# Altium PCB MainBoard.PcbDoc (part 5 of 5)
Units mm, origin at the board's own origin, x right, y up, seen from the top; angles counter-clockwise.
Board outline 82.15 x 81.5 mm, 4 copper layers (Top Layer, GND Top, GND Bot, Bottom Layer), stack 1.57 mm thick; 116 components, 97 nets, 468 pads, 3117 vias.
Unrouted connection lines stored in the file: 5.
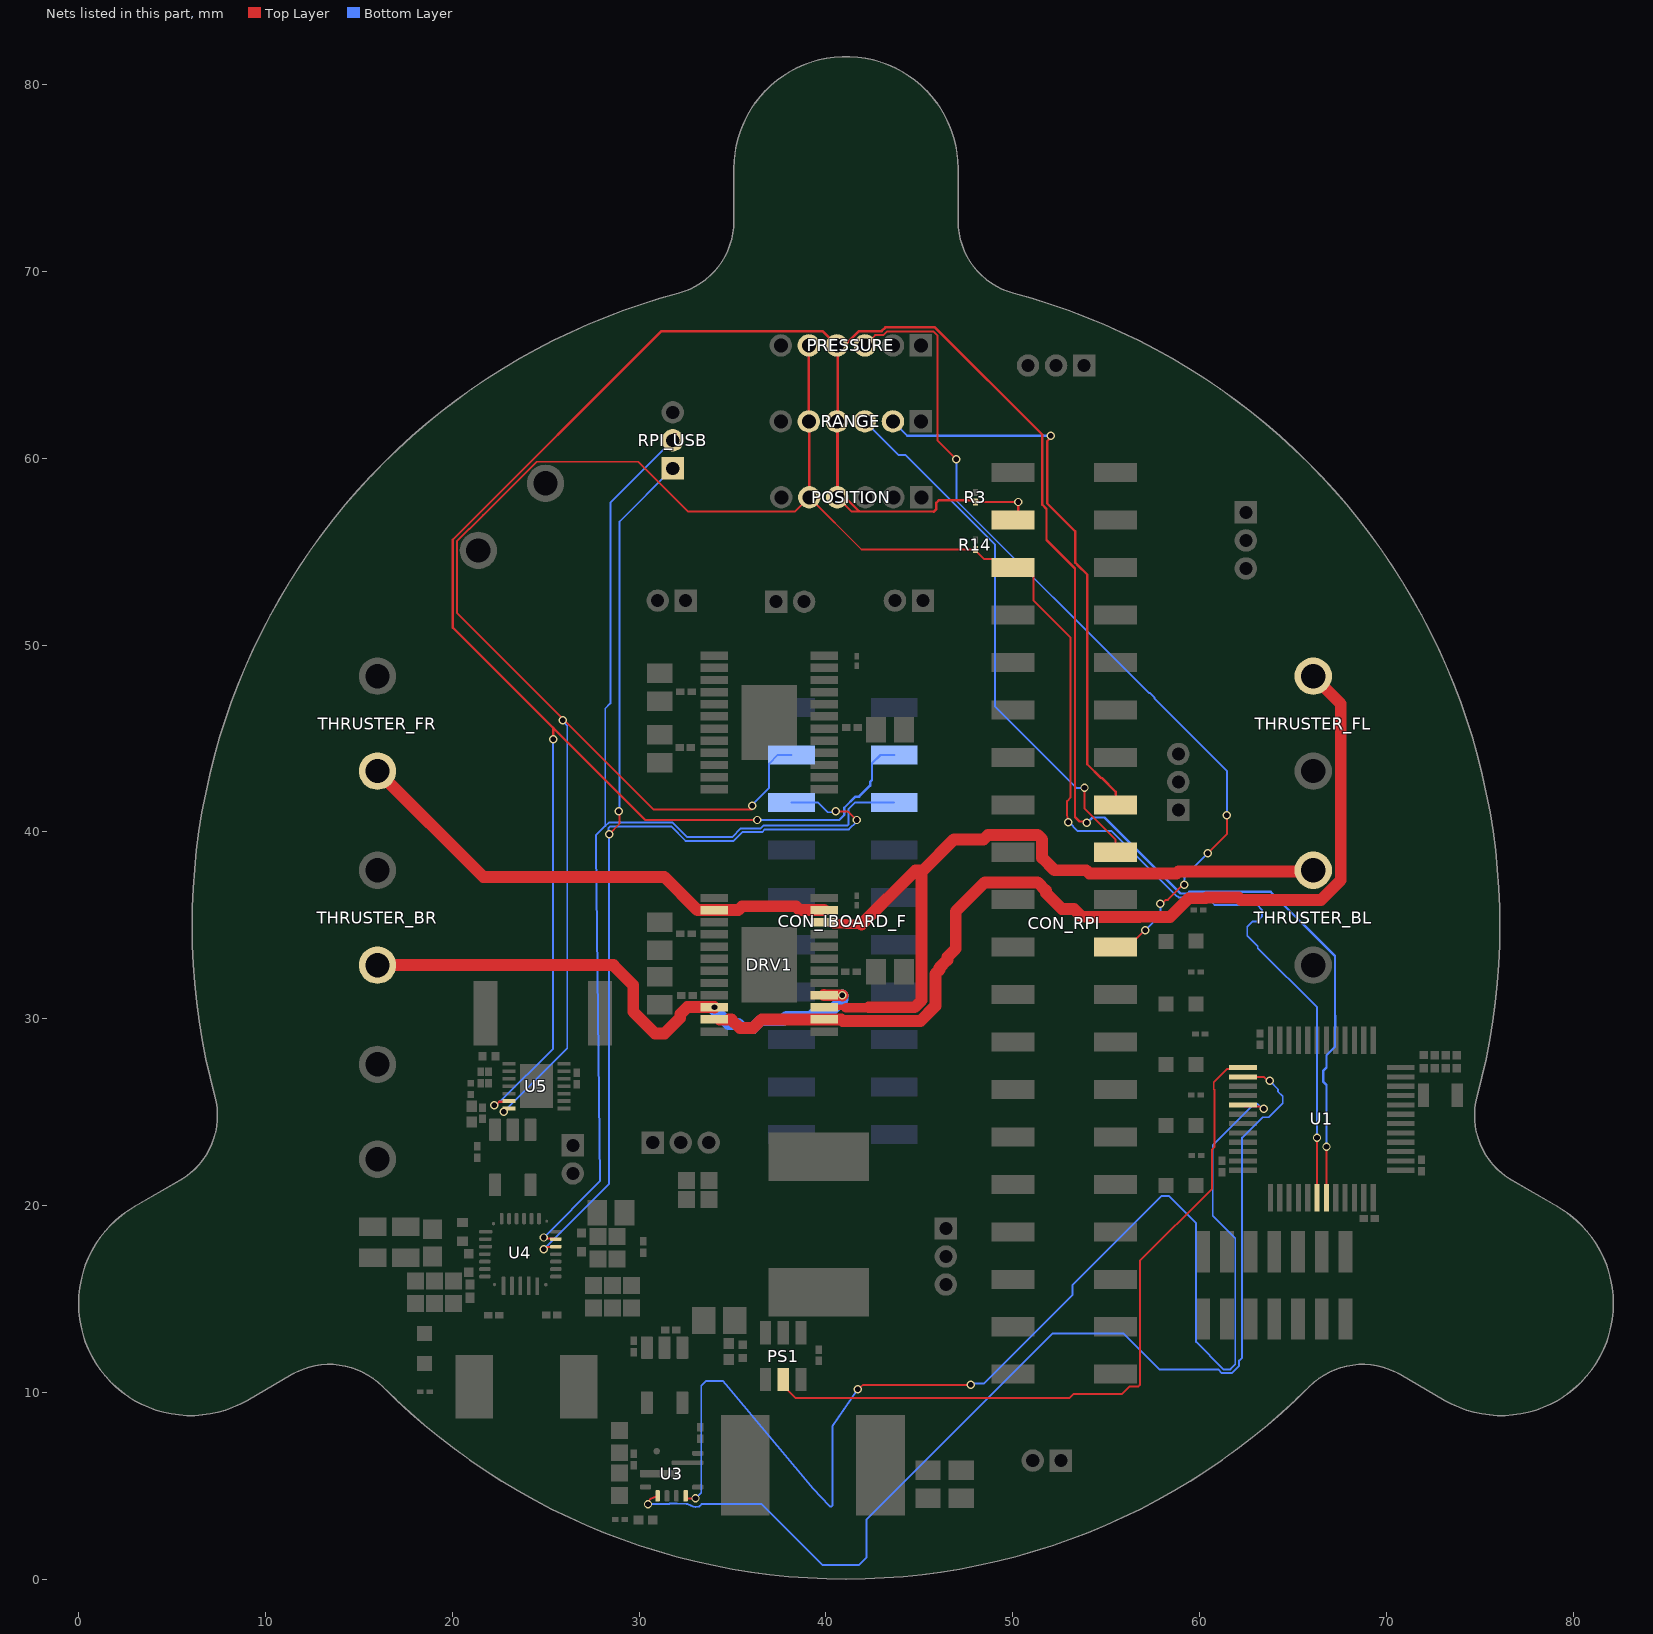
[diagram p6: the nets of this part, all layers, seen from the top]

## Via types
v1: diameter 0.45, hole 0.3, Top Layer to Bottom Layer, tented both sides, 3113 vias
v2: diameter 0.45, hole 0.3, Top Layer to Bottom Layer, 4 vias

## Nets (pads, with @x,y where several pads share a name; then routed paths per layer and width w, separated by ;. In a path a pad name is that pad's centre, name@x,y a point inside that pad or via, vN(x,y) a via of type N, cw(c..) or ccw(c..) an arc to the next point about the centre after c; other vN are vias at no path point) (continued)
PRESSURE_EOC: CON_RPI.22 PRESSURE.3 | length 46.5
  Top Layer w0.102: PRESSURE.3@42.092,66.04 42.641,66.589 43.077,66.589 43.28,66.792 45.755,66.792 45.974,66.573 45.974,60.96 v1(46.99,59.944) ; CON_RPI.22@55.512,33.833 56.152,33.833 57.06,34.741 v1(57.093,34.741) ; v1(57.912,36.161) 58.006,36.161 58.209,36.363 58.315,36.363 59.118,37.167 v1(59.182,37.167) ; v1(60.452,38.862) 61.468,39.878 v1(61.468,40.894)
  Bottom Layer w0.102: v1(46.99,59.944) 46.99,57.741 57.292,47.438 57.334,47.438 57.601,47.172 57.601,47.13 61.468,43.263 v1(61.468,40.894) ; v1(57.093,34.741) 57.912,35.56 v1(57.912,36.161) ; v1(59.182,37.167) 59.182,37.23 59.198,37.608 59.249,37.659 v1(60.452,38.862)
RANGE_GPIO1: CON_RPI.18 RANGE.3 | length 29.1
  Top Layer w0.102: v1(53.848,42.361) 53.848,41.242 55.512,39.577 CON_RPI.18@55.512,38.913
  Bottom Layer w0.102: RANGE.3@42.092,61.976 43.897,60.17 44.273,60.17 49.06,55.383 49.06,46.698 53.397,42.361 v1(53.848,42.361)
RANGE_SHUT: CON_RPI.16 RANGE.2 | length 30.2
  Top Layer w0.127: v1(52.051,61.214) 52.051,61.127 51.849,60.925 51.849,57.584 53.349,56.085 53.349,54.417 53.502,54.264 53.994,53.771 53.994,43.618 54.726,42.885 54.78,42.885 55.512,42.153 CON_RPI.16@55.512,41.453
  Bottom Layer w0.127: RANGE.2@43.592,61.976 44.357,61.211 52.048,61.211 v1(52.051,61.214)
REG5V_EN: PS1.5 U1.25 | length 39.7
  Top Layer w0.102: PS1.5@37.719,10.688 37.719,10.363 38.375,9.707 53.045,9.707 53.248,9.911 55.851,9.911 56.251,10.31 56.726,10.31 56.815,10.4 56.815,17.049 60.677,20.911 60.677,23.014 60.807,23.144 60.807,26.186 60.763,26.229 60.763,26.603 61.46,27.299 62.243,27.299 U1.25@62.332,27.388
REG12_PG: U1.29 U3.4 | length 73.3
  Top Layer w0.102: U3.4@32.497,4.461 32.571,4.322 v1(33.024,4.322) ; v2(41.704,10.171) 41.992,10.405 47.743,10.405 v2(47.752,10.414) ; U1.29@62.332,25.388 62.418,25.302 63.221,25.302 63.345,25.178 v1(63.439,25.178)
  Bottom Layer w0.102: v1(33.024,4.322) 33.331,4.629 33.331,10.347 33.595,10.611 34.472,10.611 34.641,10.441 39.326,4.833 40.185,3.924 40.216,3.893 40.3,3.893 40.36,3.952 40.361,8.2 v2(41.704,10.171) ; v2(47.752,10.414) 47.809,10.471 48.447,10.471 53.213,15.237 53.213,15.751 57.979,20.517 58.353,20.517 59.817,19.053 59.817,12.697 61.281,11.233 61.655,11.233 61.919,11.497 61.919,18.258 60.712,19.464 60.712,23.234 62.925,25.447 63.103,25.447 63.372,25.178 v1(63.439,25.178)
REG12V_EN: U1.26 U3.1 | length 59.4
  Top Layer w0.102: v1(30.48,4.016) 30.573,4.257 30.602,4.286 30.923,4.428 U3.1@30.997,4.461 ; U1.26@62.332,26.888 63.442,26.888 63.66,26.67 v1(63.754,26.67)
  Bottom Layer w0.102: v1(30.48,4.016) 31.606,4.016 31.648,4.057 32.021,4.057 32.033,4.045 32.538,4.025 cw(c32.52,3.575) 32.773,3.948 ccw(c33.024,4.322) 33.087,3.876 33.236,3.897 33.355,4.016 36.564,4.016 39.817,0.762 41.786,0.762 42.168,1.145 42.168,3.182 52.13,13.144 55.937,13.144 57.848,11.233 60.994,11.233 61.197,11.03 61.739,11.03 62.122,11.413 62.122,11.7 62.287,11.866 62.287,23.637 63.377,24.727 63.718,24.727 64.459,25.467 64.459,25.841 64.205,26.095 64.205,26.219 v1(63.754,26.67)
RPI_SCL: CON_IBOARD_F.9 CON_RPI.5 POSITION.5 PRESSURE.5 R14.1 RANGE.5 U1.42 U5.14 | length 138.6
  Top Layer w0.102: v1(25.908,45.974) 25.9,45.982 v1@25.9,46.076 ; v1(36.068,41.402) 36.062,41.396 36.062,41.205 30.771,41.205 v1@25.9,46.076 ; v1(52.978,40.508) 52.914,40.936 52.914,41.655 53.104,41.845 53.104,50.397 52.55,50.951 51.112,52.389 51.112,53.694 50.653,54.153 CON_RPI.5@50.013,54.153 49.553,54.612 48.466,54.612 48.006,55.072 R14.1@48.006,55.118 41.91,55.118 POSITION.5@39.116,57.912 38.363,57.16 32.619,57.16 29.965,59.814 24.517,59.814 21.658,56.954 21.658,56.947 20.932,56.222 20.925,56.222 20.25,55.547 20.25,51.726 v1@25.9,46.076 ; v1(66.294,23.622) 66.296,23.62 66.296,20.424 U1.42@66.298,20.422
  Top Layer w0.127: PRESSURE.5@39.092,66.04 RANGE.5@39.092,61.976 39.104,61.964 39.104,57.924 POSITION.5@39.116,57.912
  Bottom Layer w0.102: v1(22.76,25.012) 26.162,28.415 26.162,45.694 25.908,45.948 v1(25.908,45.974) ; v1(36.068,41.402) 36.068,41.465 36.96,42.356 36.96,43.661 37.419,44.12 CON_IBOARD_F.9@38.159,44.12 ; v1(52.978,40.508) 53.021,40.508 53.471,40.058 53.757,40.058 53.77,40.044 55.305,40.044 58.795,36.554 cw(c58.791,36.453) 58.863,36.525 ; 58.863,36.524 58.901,36.487 59.463,36.487 59.552,36.576 60.328,36.576 60.806,36.098 63.081,36.098 63.345,35.834 63.345,35.46 63.081,35.196 62.824,35.196 62.56,34.932 62.56,34.429 63.119,33.871 63.119,33.785 66.294,30.61 v1(66.294,23.622)
RPI_SDA: CON_IBOARD_F.12 CON_RPI.3 POSITION.4 PRESSURE.4 R3.1 RANGE.4 U1.43 U5.13 | length 173.5
  Top Layer w0.102: POSITION.4@40.616,57.912 41.368,57.16 41.786,57.16 45.779,57.16
  Top Layer w0.127: v1(22.25,25.375) 22.338,25.375 22.517,25.554 22.999,25.554 U5.13@23.036,25.591 ; v1(25.4,44.958) 25.4,45.573 ; v1(36.322,40.64) 30.333,40.64 25.4,45.573 ; RANGE.4@40.592,61.976 40.604,61.964 40.604,58.306 40.604,57.924 POSITION.4@40.616,57.912 ; PRESSURE.4@40.592,65.67 PRESSURE.4@40.592,66.04 39.827,66.805 31.203,66.805 20.034,55.636 20.034,50.938 25.4,45.573 ; 41.786,57.16 40.64,58.306 40.64,61.964 40.64,65.67 41.775,66.805 42.987,66.805 43.191,67.008 45.844,67.008 51.587,61.265 51.587,57.523 51.816,57.294 51.816,55.626 53.34,54.102 53.34,40.797 53.581,40.557 53.895,40.557 v1(53.957,40.495) ; 45.784,57.147 45.92,57.283 45.92,57.624 46.056,57.76 48.079,57.76 48.181,57.658 v1(50.292,57.658) 50.292,56.972 CON_RPI.3@50.013,56.693 ; U1.43@66.798,20.422 66.8,20.424 66.8,23.152 v1(66.802,23.154)
  Bottom Layer w0.102: v1(22.25,25.375) 22.345,25.375 22.543,25.573 22.575,25.573 25.4,28.398 v1(25.4,44.958)
  Bottom Layer w0.127: v1(36.322,40.64) 40.718,40.64 40.989,40.912 40.989,41.295 41.582,41.887 41.781,41.887 42.373,42.48 42.373,42.679 42.473,42.778 42.473,43.674 42.919,44.12 CON_IBOARD_F.12@43.659,44.12 ; v1(53.957,40.495) 53.996,40.495 54.27,40.769 54.924,40.769 58.99,36.703 59.374,36.703 59.463,36.792 63.814,36.792 67.256,33.35 67.256,30.174 67.265,30.164 67.265,29.579 67.256,29.569 67.256,28.503 66.802,28.049 66.802,27.395 66.618,27.211 66.618,26.637 66.802,26.453 v1(66.802,23.154)
THRUSTER_BL: DRV1.3 DRV1.10 THRUSTER_BL.1 | length 41.6
  Top Layer w0.305: DRV1.3@39.912,30.614 41.043,30.614 41.069,30.588
  Top Layer w0.508: DRV1.10@40.386,35.095 41.081,35.095 41.124,35.052 41.91,35.052 ; 41.069,30.588 42.272,30.588 42.298,30.614
  Top Layer w0.635: 41.91,35.052 44.806,37.948 45.212,37.948 ; 42.298,30.614 44.756,30.614 45.128,30.986 45.128,37.864 45.212,37.948 ; THRUSTER_BL.1@66.091,37.948 66.027,37.884 58.885,37.884 58.781,37.781 54.105,37.781 53.938,37.948 52.241,37.948 51.582,38.607 51.582,39.596 51.336,39.842 48.689,39.842 48.444,39.596 46.861,39.596 45.212,37.948
THRUSTER_BR: DRV1.4 DRV1.22 THRUSTER_BR.1 | length 30.3
  Top Layer w0.635: THRUSTER_BR.1@16.002,32.868 28.626,32.868 29.693,31.801 29.693,30.376 30.852,29.216 31.378,29.216 32.209,30.047 32.209,30.248 32.581,30.62 34.03,30.62 DRV1.22@34.036,30.614 v1(34.042,30.608) ; DRV1.4@39.912,31.264 39.918,31.258 40.878,31.258 v1(40.885,31.251)
  Bottom Layer w0.635: v1(34.042,30.608) 34.042,30.469 34.793,29.718 35.307,29.718 35.517,29.509 36.111,29.509 36.525,29.922 37.71,29.922 37.893,30.105 39.197,30.105 39.379,30.288 40.149,30.288 40.885,31.024 v1(40.885,31.251)
THRUSTER_FL: DRV1.2 DRV1.23 THRUSTER_FL.1 | length 52.4
  Top Layer w0.305: DRV1.23@34.036,29.964 DRV1.23@34.036,29.972
  Top Layer w0.508: DRV1.23@34.29,29.895 34.723,29.895 34.798,29.97
  Top Layer w0.635: 34.804,29.964 34.834,29.964 34.84,29.958 34.947,29.958 35.397,29.509 36.114,29.509 36.569,29.964 DRV1.2@39.912,29.964 39.918,29.958 40.823,29.958 40.904,29.877 45.061,29.877 45.865,30.681 45.865,32.4 46.086,32.621 46.086,32.73 46.506,33.15 46.506,33.298 46.952,33.744 46.952,35.743 48.511,37.302 51.336,37.302 51.776,36.862 51.776,36.733 52.629,35.881 53.28,35.881 53.702,35.458 54.174,35.458 54.189,35.444 56.781,35.444 56.796,35.458 57.6,35.458 57.614,35.444 58.418,35.444 59.424,36.449 60.346,36.449 60.377,36.481 62.103,36.481 62.22,36.364 66.515,36.364 67.564,37.414 67.564,46.863 THRUSTER_FL.1@66.091,48.336
THRUSTER_FR: DRV1.11 DRV1.14 THRUSTER_FR.1 | length 27.2
  Top Layer w0.635: THRUSTER_FR.1@16.002,43.256 21.666,37.592 31.353,37.592 33.125,35.82 34.03,35.82 DRV1.14@34.036,35.814 34.042,35.82 35.313,35.82 35.517,36.023 38.397,36.023 38.601,35.82 39.906,35.82 DRV1.11@39.912,35.814
USB_N: CON_IBOARD_F.13 RPI_USB.2 U4.7 | length 63.4
  Top Layer w0.102: v1(24.892,18.288) 24.936,18.244 25.503,18.244 U4.7@25.547,18.199
  Bottom Layer w0.102: v1(24.892,18.288) 27.907,21.303 27.907,21.346 27.695,39.116 27.695,39.813 28.205,40.323 ; RPI_USB.2@31.808,60.96 28.465,57.617 28.465,46.878 28.194,46.606 28.194,40.323 28.205,40.323 ; CON_IBOARD_F.13@43.659,41.58 41.58,41.58 41.205,41.205 41.205,40.392 41.148,40.335 36.655,40.335 36.509,40.189 35.448,40.189 34.985,39.726 32.573,39.726 31.799,40.5 28.382,40.5 28.205,40.323
USB_P: CON_IBOARD_F.8 RPI_USB.1 U4.6 | length 63.8
  Top Layer w0.102: v1(24.892,17.663) 24.986,17.663 25.095,17.772 25.52,17.772 U4.6@25.547,17.799 ; v1(28.397,39.878) 28.956,40.437 28.956,41.074 v1(28.919,41.111) ; v1(40.526,41.103) 41.167,41.103 41.63,40.64 v1(41.656,40.64)
  Bottom Layer w0.102: v1(24.892,17.663) 24.905,17.663 28.397,21.156 v1(28.397,39.878) 28.365,39.91 28.365,40.196 28.466,40.297 31.715,40.297 32.489,39.523 35.069,39.523 35.532,39.986 36.593,39.986 36.739,40.132 41.232,40.132 41.656,40.556 v1(41.656,40.64) ; v1(28.919,41.111) 28.956,41.148 28.956,56.608 RPI_USB.1@31.808,59.46 ; CON_IBOARD_F.8@38.159,41.58 39.57,41.58 40.098,41.053 40.475,41.053 v1(40.526,41.103)
pads on no net: CHIPSET_DBG.1 CHIPSET_DBG.2 CHIPSET_DBG.9 CHIPSET_DBG.10 CON_RPI.11 CON_RPI.27 CON_RPI.28 CON_RPI.32 CON_RPI.33 CON_RPI.37 DRV1.9 DRV1.15 DRV1.17 DRV1.18 DRV2.9 DRV2.15 DRV2.17 DRV2.18 PRESSURE.2 U1.2 U1.3 U1.4 U1.5 U1.6 U1.32 U1.33 U1.40 U1.44 U1.45 U1.46 U2.4 U2.5 U3.5 U5.2 U5.3 U5.4 U5.5 U6.4 U6.5

## Polygon pours and split planes (outlines as drawn)
GND on Bottom Layer "NONET_L01_P-001" (solid, pour order 16): 0,0 0,82.715 45.984,82.715 99.822,82.715 99.822,57.658 99.822,0
+12 on Bottom Layer "NONET_L01_P-001" (solid, pour order 22): 45.466,24.748 45.466,62.992 28.448,62.992 28.448,24.638
GND on Bottom Layer "NONET_L01_P-001" (solid, pour order 21): 36.83,32.258 47.752,32.258 47.752,28.194 46.228,28.194 45.974,28.448 45.974,29.972 45.212,30.734 36.83,30.734
+12 on Bottom Layer "NONET_L01_P-001" (solid, pour order 19): 42.418,29.464 45.466,29.464 45.466,27.686 42.418,27.686
PACK- on Bottom Layer "NONET_L01_P-001" (solid, pour order 4): 14.478,29.21 20.32,29.21 20.32,31.75 20.828,32.258 22.606,32.258 26.924,27.94 26.924,24.892 25.146,24.892 24.892,24.638 24.892,23.368 23.696,23.368 23.622,23.294 23.622,24.638 21.721,24.638 20.959,25.4 14.478,25.4
GND on Bottom Layer "NONET_L01_P-001" (solid, pour order 20): 36.83,26.924 44.958,26.924 44.958,25.654 36.83,25.654
+12 on Bottom Layer "NONET_L01_P-001" (solid, pour order 18): 39.37,29.464 36.322,29.464 36.322,27.686 39.37,27.686
BATCHG_VBUS on Bottom Layer "NONET_L01_P-001" (solid, pour order 12): 25.146,16.764 26.416,16.764 27.432,17.78 29.972,17.78 36.83,24.638 45.466,24.638 45.466,22.86 44.45,21.844 37.846,21.844 32.258,16.256 32.004,16.002 25.146,16.002
BATCHG_SYS on Bottom Layer "NONET_L01_P-001" (solid, pour order 9): 32.258,8.128 32.258,6.35 29.972,6.35 29.718,6.096 29.718,5.334 25.4,5.334 17.526,13.208 17.526,15.24 22.352,15.24 22.606,15.494 22.606,15.748 23.114,15.748 22.86,15.494 22.86,14.732 23.114,14.732 29.718,8.128
PACK+ on Bottom Layer "NONET_L01_P-001" (solid, pour order 3): 14.478,24.13 17.526,24.13 17.526,19.558 23.622,19.558 23.622,15.748 14.478,15.748
GND on Top Layer "NONET_L01_P-001" (solid, pour order 15): 0.305,0 0.305,84.328 38.862,84.328 93.726,84.328 107.95,70.104 107.95,5.588 107.95,0
PACK- on Top Layer "NONET_L01_P-001" (solid, pour order 5): 14.478,29.21 20.32,29.21 20.32,31.75 20.828,32.258 22.606,32.258 26.924,27.94 26.924,24.892 25.146,24.892 24.892,24.638 24.892,23.368 23.696,23.368 23.622,23.294 23.622,24.638 21.721,24.638 20.959,25.4 14.478,25.4
+12 on Top Layer "NONET_L01_P-001" (solid, pour order 23): 33.782,2.643 33.782,1.27 36.322,1.27 36.322,2.643
GND on Top Layer "NONET_L01_P-001" (solid, pour order 14): 27.94,5.334 29.718,5.334 29.718,6.096 29.972,6.35 32.766,6.35 32.766,2.794 27.94,3.302
+12 on Top Layer "NONET_L01_P-001" (solid, pour order 24): 10.922,40.64 12.446,42.164 13.462,41.148 13.462,40.894 12.446,39.878 12.446,38.862 10.922,38.862
PACK+ on Top Layer "NONET_L01_P-001" (solid, pour order 2): 16.256,25.146 23.622,25.146 23.622,15.699 14.478,15.699 14.478,23.368
BATCHG_VBUS on Top Layer "NONET_L01_P-001" (solid, pour order 13): 25.146,16.999 26.651,16.999 27.432,17.78 29.972,17.78 29.972,16.002 25.146,16.002
GND on Top Layer "NONET_L01_P-001" (solid, pour order 11): 23.368,19.05 23.368,20.32 25.4,20.32 25.355,20.275 25.355,19.039
BATCHG_SYS on Top Layer "NONET_L01_P-001" (solid, pour order 10): 29.972,6.715 29.972,8.128 32.258,8.128 32.258,6.35 29.972,6.35
BATCHG_SW2 on Top Layer "NONET_L01_P-001" (solid, pour order 7): 20.066,8.382 20.066,12.192 22.86,14.986 23.622,14.986 23.622,8.636 23.368,8.382
BATCHG_SW1 on Top Layer "NONET_L01_P-001" (solid, pour order 8): 27.94,8.382 27.94,12.192 25.136,14.996 23.876,14.996 23.876,8.636 24.13,8.382
GND on GND Bot (split plane): 443 vertices, not listed, extent 0.509,0.517 81.652,80.996
GND on GND Top (split plane): 443 vertices, not listed, extent 0.509,0.517 81.652,80.996

## Silkscreen, mask and mechanical layers (free items; w line width, h text height)
Mechanical 1:
  circle w0.013: c76.154,14.756 r4.2
  circle w0.013: c6.006,14.756 r4.2
  circle w0.013: c41.08,75.506 r4.2
  lines w0.013: 3.006,19.953 ccw(c6.006,14.756) 9.006,9.56 11.435,10.962 cw(c13.435,7.498) 16.27,10.319 ccw(c41.08,35.006) 65.891,10.319 cw(c68.726,7.498) 70.726,10.962 73.154,9.56 ccw(c76.154,14.756) 79.154,19.953 76.726,21.354 cw(c78.726,24.819) 74.865,25.863 ccw(c41.08,35.006) 50.055,68.836 cw(c51.08,72.703) 47.08,72.703 47.08,75.506 ccw(c41.08,75.506) 35.08,75.506 35.08,72.703 cw(c31.08,72.703) 32.106,68.836 ccw(c41.08,35.006) 7.296,25.863 cw(c3.435,24.819) 5.435,21.354 3.006,19.953

## Text inside footprints (layer, text, board x,y; h text height)
U1: Top Overlay "*" at 72.39,21.59 h1.02 r180; Mechanical 13 "*" at 72.453,21.892 h1.02 r180